# EAGLE board esp32-driver (EAGLE 7.5.0)
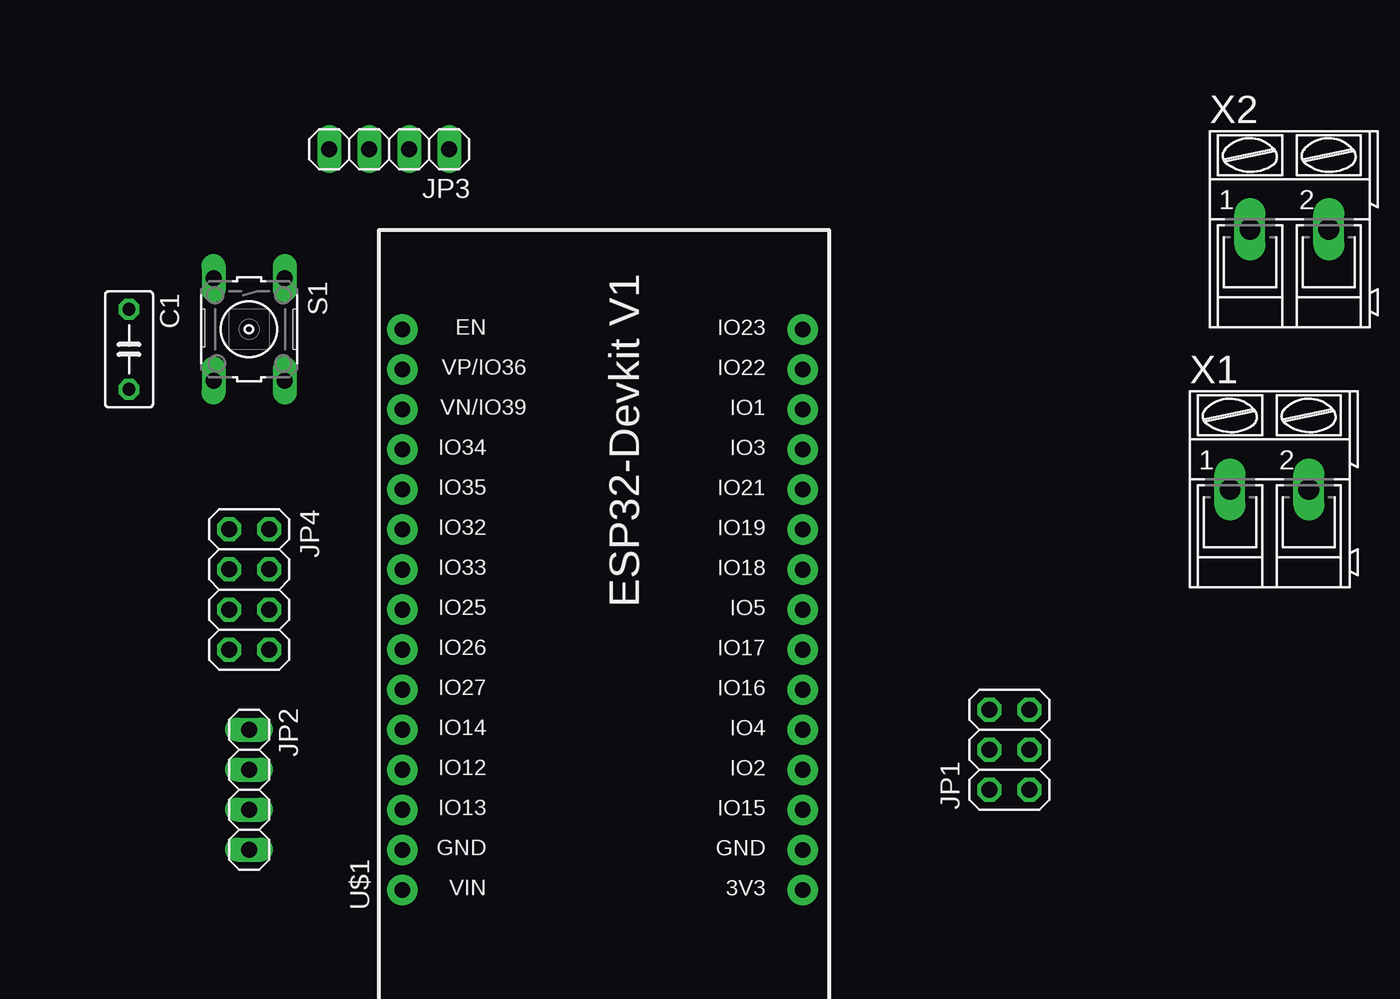
[diagram p0: board, top side]
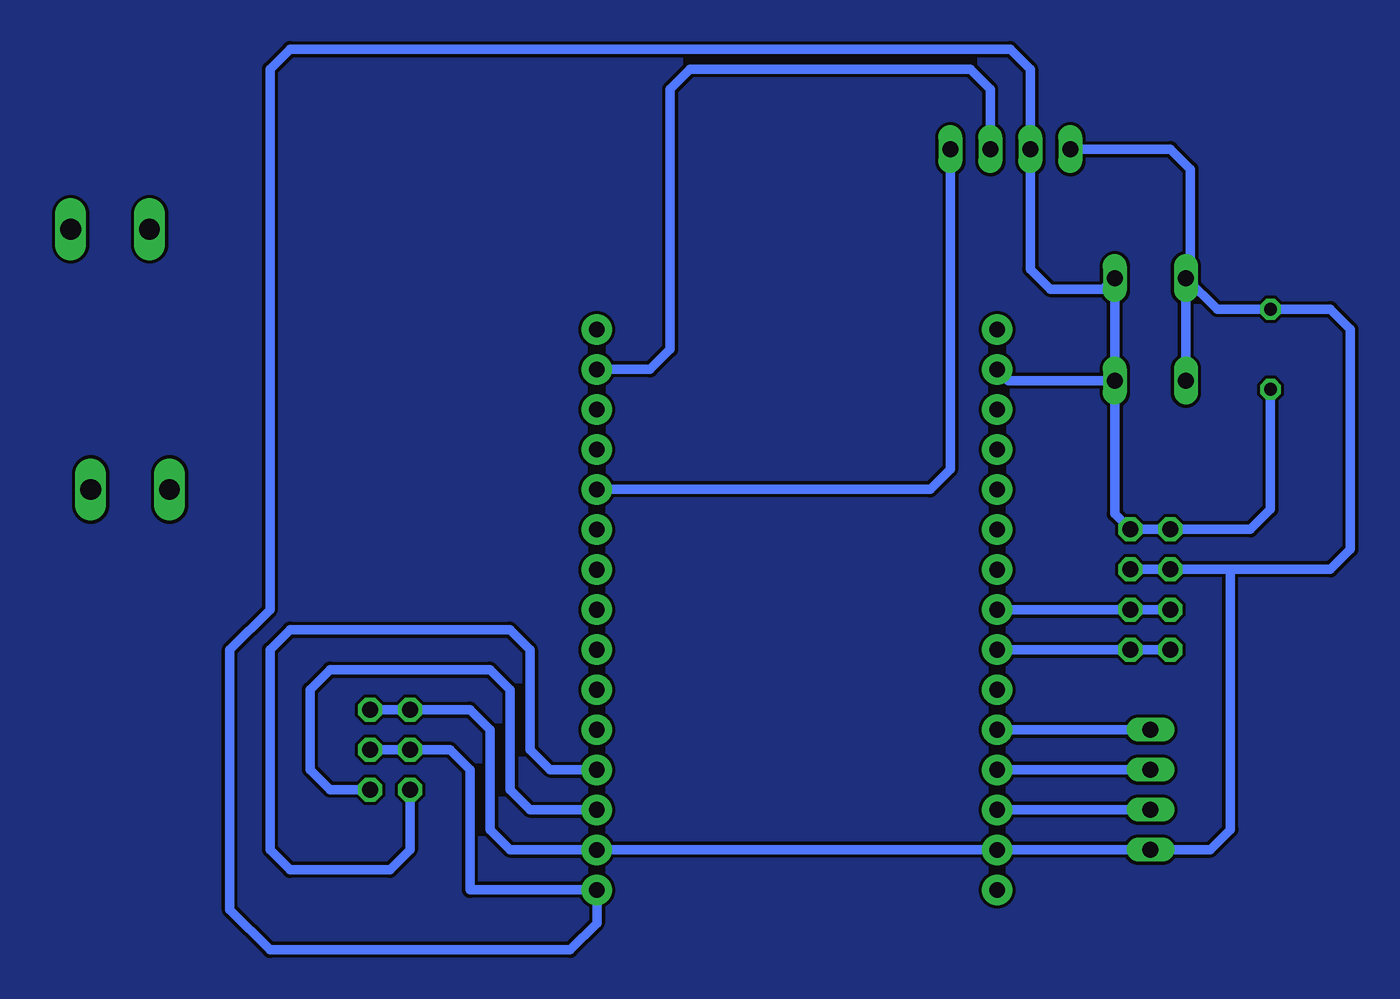
[diagram p1: board, bottom side, seen from below]

No outline drawn. Coordinates in mm, seen from the top.
Copper layers (1*16): Top 0.035mm / dielectric 1.5mm / Bottom 0.035mm
Design rules "default": minimum track width 10mil, minimum drill 24mil, track to track 8mil, track to pad 8mil, pad to pad 8mil, via to via 8mil, smd to smd 8mil, copper to edge 40mil, drill to drill 8mil, minimum pad ring 10mil, minimum via ring 8mil, stop-mask expansion 4mil, vias tented up to drill 0mil, thermal gap 10mil

## Footprints (pad centres in the part's own frame; a part is rotated, then mirrored left to right if it is on the bottom)
C050-030X075 = drill 0.813 octagon: 1 -2.54,0; 2 2.54,0
2X03 = drill 1.016 octagon: 1 -2.54,-1.27; 2 -2.54,1.27; 3 0,-1.27; 4 0,1.27; 5 2.54,-1.27; 6 2.54,1.27
1X04 = drill 1.016 long: 1 -3.81,0; 2 -1.27,0; 3 1.27,0; 4 3.81,0
2X04 = drill 1.016 octagon: 1 -3.81,-1.27; 2 -3.81,1.27; 3 -1.27,-1.27; 4 -1.27,1.27; 5 1.27,-1.27; 6 1.27,1.27; 7 3.81,-1.27; 8 3.81,1.27
B3F-10XX = drill 1.016 long: 1 -3.251,2.261; 2 3.251,2.261; 3 -3.251,-2.261; 4 3.251,-2.261
ESP32-DEVKITV1 = drill 1 pad 1.93: 3V3 -16.52,-12.27; D1 13.96,-12.27; D2 -8.9,-12.27; D3 11.42,-12.27; D4 -6.36,-12.27; D5 1.26,-12.27; D12 -8.9,13.135; D13 -11.44,13.135; D14 -6.36,13.135; D15 -11.44,-12.27; D16 -3.82,-12.27; D17 -1.28,-12.27; D18 3.8,-12.27; D19 6.34,-12.27; D21 8.88,-12.27; D22 16.5,-12.27; D23 19.04,-12.27; D25 1.26,13.135; D26 -1.28,13.135; D27 -3.82,13.135; D32 6.34,13.135; D33 3.8,13.135; D34 11.42,13.135; D35 8.88,13.135; D36 16.5,13.135; D39 13.96,13.135; EN 19.04,13.135; GND@1 -13.98,13.135; GND@2 -13.98,-12.27; VIN -16.52,13.135
AK300/2 = drill 1.321 long: 1 -2.515,0; 2 2.489,0

## Placement (x,y rotation side)
C1  [C050-030X075]  21.59,50.8 270 top
JP1  [2X03]  77.47,25.4 90 top
JP2  [1X04]  29.21,22.86 270 top
JP3  [1X04]  38.1,63.5 180 top
JP4  [2X04]  29.21,35.56 270 top
S1  [B3F-10XX]  29.21,52.07 270 top
U$1  ESP32DEVKITV1  [ESP32-DEVKITV1]  52.07,33.02 90 top
X1  [AK300/2]  93.98,41.91 0 top
X2  [AK300/2]  95.25,58.42 0 top

## Library data of the parts
C1 = rcl; SPICEPREFIX: C
JP1-JP4 = pinhead
S1 = switch-omron; MPN: B3F-1000; OC_FARNELL: 176432; OC_NEWARK: 36M3542
U$1 = esp32-devkitv1
X1 X2 = con-ptr500; OC_FARNELL: unknown; OC_NEWARK: unknown

## Nets
GND: C1.1 JP1.5 JP1.6 JP2.4 JP3.4 JP4.3 JP4.4 S1.3 S1.4 U$1.GND@1 U$1.GND@2
MOISTURE: JP1.2 U$1.D2
OUT1: JP2.1 U$1.D14
OUT2: JP2.2 U$1.D12
OUT3: JP2.3 U$1.D13
PH: JP1.1 U$1.D15
SCL: JP3.2 U$1.D22
SCL2: JP4.5 JP4.6 U$1.D25
SDA: JP3.1 U$1.D21
SDA2: JP4.7 JP4.8 U$1.D26
V: C1.2 JP1.3 JP1.4 JP3.3 JP4.1 JP4.2 S1.1 S1.2 U$1.3V3 U$1.D36
VIN: U$1.VIN

## Tracks (layer width: path | path; a pad name or v marks a point on that pad's centre or on a via)
GND
  Bottom 0.61: S1.3 24.97,53.34 C1.1 17.78,53.34 16.51,52.07 16.51,38.1 17.78,36.83 24.13,36.83 | 24.13,36.83 JP4.3 JP4.4 | S1.4 26.95,54.33 26.67,54.61 26.67,55.04 S1.3 | JP3.4 27.94,63.5 26.67,62.23 26.67,55.6 S1.3 | 24.13,36.83 24.13,20.32 25.4,19.05 JP2.4 38.92,19.05 U$1.GND@1 U$1.GND@2 69.85,19.05 71.12,20.32 71.12,26.67 72.39,27.94 JP1.6 JP1.5
MOISTURE
  Bottom 0.61: JP1.2 76.2,19.05 77.47,17.78 83.82,17.78 85.09,19.05 85.09,31.75 83.82,33.02 69.85,33.02 68.58,31.75 68.58,25.4 67.31,24.13 U$1.D2
N$1
  pour Bottom: 3.81,73.66 104.14,73.66 104.14,-2.54 3.81,-2.54
OUT1
  Bottom 0.61: U$1.D14 JP2.1
OUT2
  Bottom 0.61: JP2.2 38.92,24.13 U$1.D12
OUT3
  Bottom 0.61: JP2.3 38.92,21.59 U$1.D13
PH
  Bottom 0.61: JP1.1 81.28,22.86 82.55,24.13 82.55,29.21 81.28,30.48 71.12,30.48 69.85,29.21 69.85,22.86 68.58,21.59 U$1.D15
SCL
  Bottom 0.61: JP3.2 39.37,67.31 40.64,68.58 58.42,68.58 59.69,67.31 59.69,50.8 60.96,49.53 U$1.D22
SCL2
  Bottom 0.61: U$1.D25 JP4.6 | JP4.6 | JP4.6 JP4.5
SDA
  Bottom 0.61: JP3.1 41.91,43.18 43.18,41.91 U$1.D21
SDA2
  Bottom 0.61: JP4.7 JP4.8 U$1.D26
V
  Bottom 0.61: C1.2 21.59,40.64 22.86,39.37 JP4.1 JP4.2 31.47,40.36 S1.2 | S1.2 S1.1 32.18,54.61 35.56,54.61 36.83,55.88 JP3.3 36.83,68.58 38.1,69.85 83.82,69.85 85.09,68.58 85.09,34.29 87.63,31.75 87.63,15.24 85.09,12.7 66.04,12.7 64.34,14.4 U$1.3V3 72.38,16.5 72.39,16.51 72.39,24.13 73.66,25.4 JP1.4 JP1.3 | S1.2 38.23,48.82 U$1.D36